# Altium PCB NCKH_PCBnew.PcbDoc
Units mm, origin at the board's own origin, x right, y up, seen from the top; angles counter-clockwise.
Board outline 122.81 x 140.59 mm, 2 copper layers (Top Layer, Bottom Layer); 78 components, 73 nets, 197 pads, 1 vias.
Unrouted connection lines stored in the file: 2.
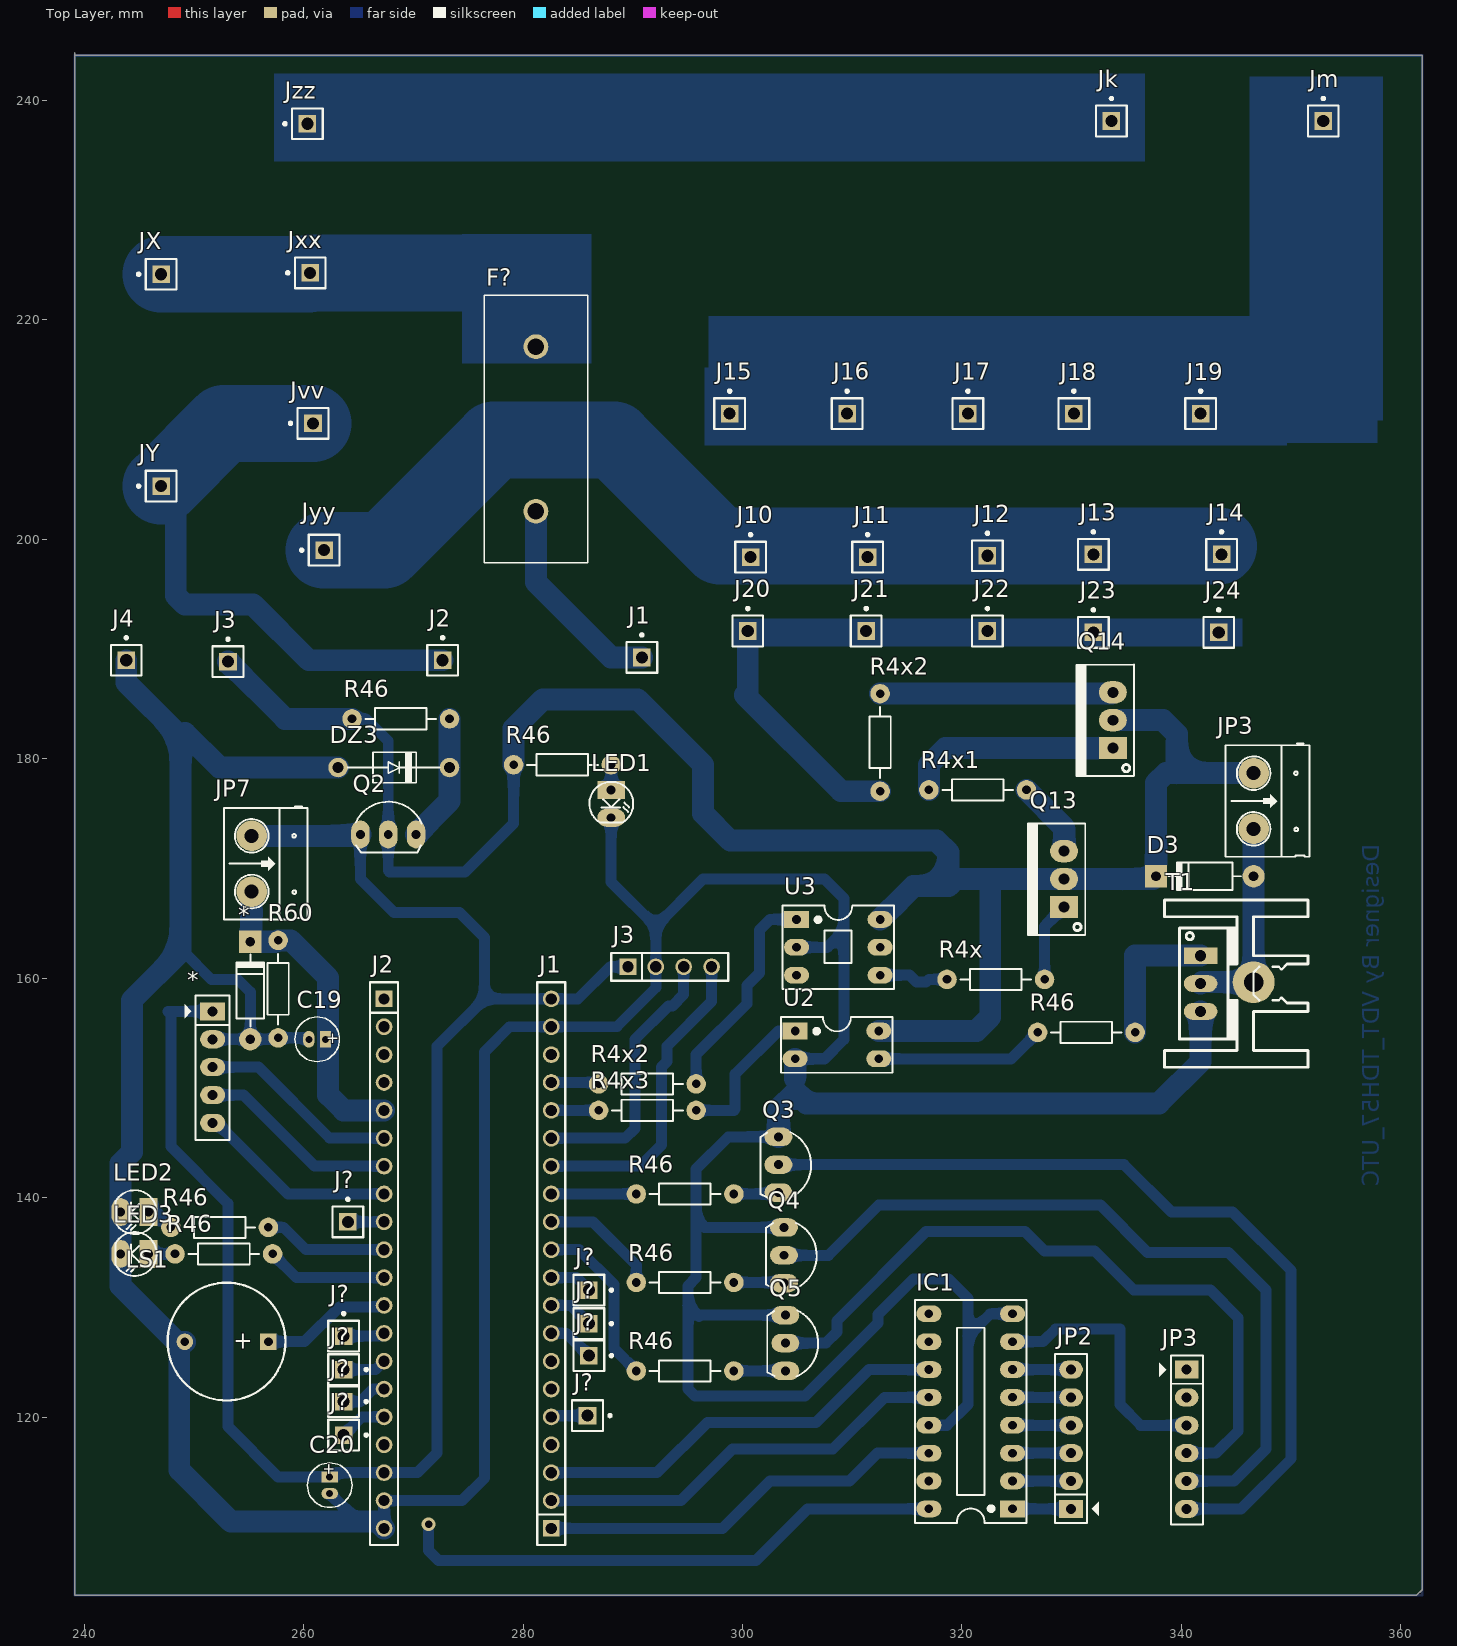
[diagram p0: Top Layer view]
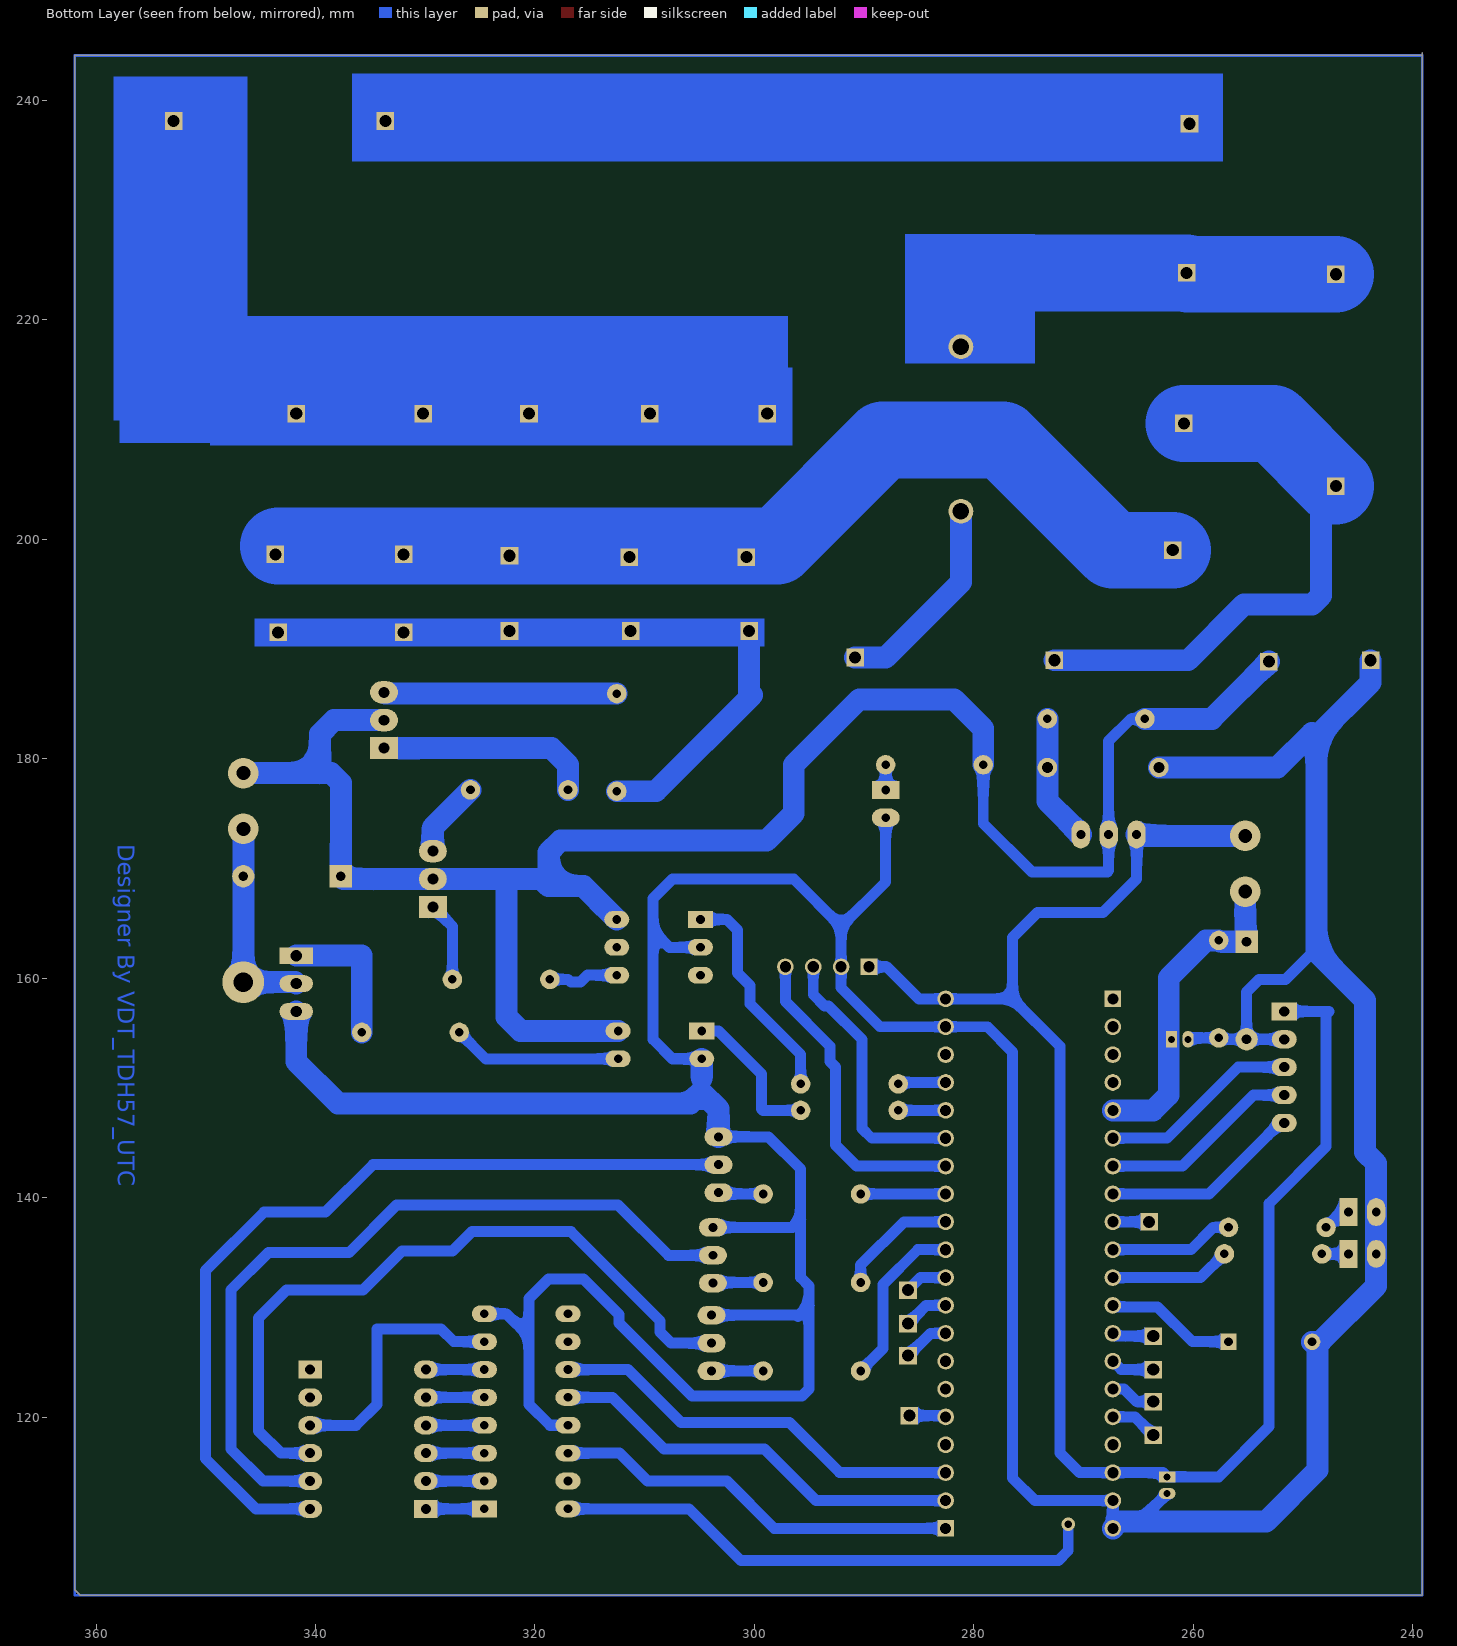
[diagram p1: Bottom Layer view, seen from below]
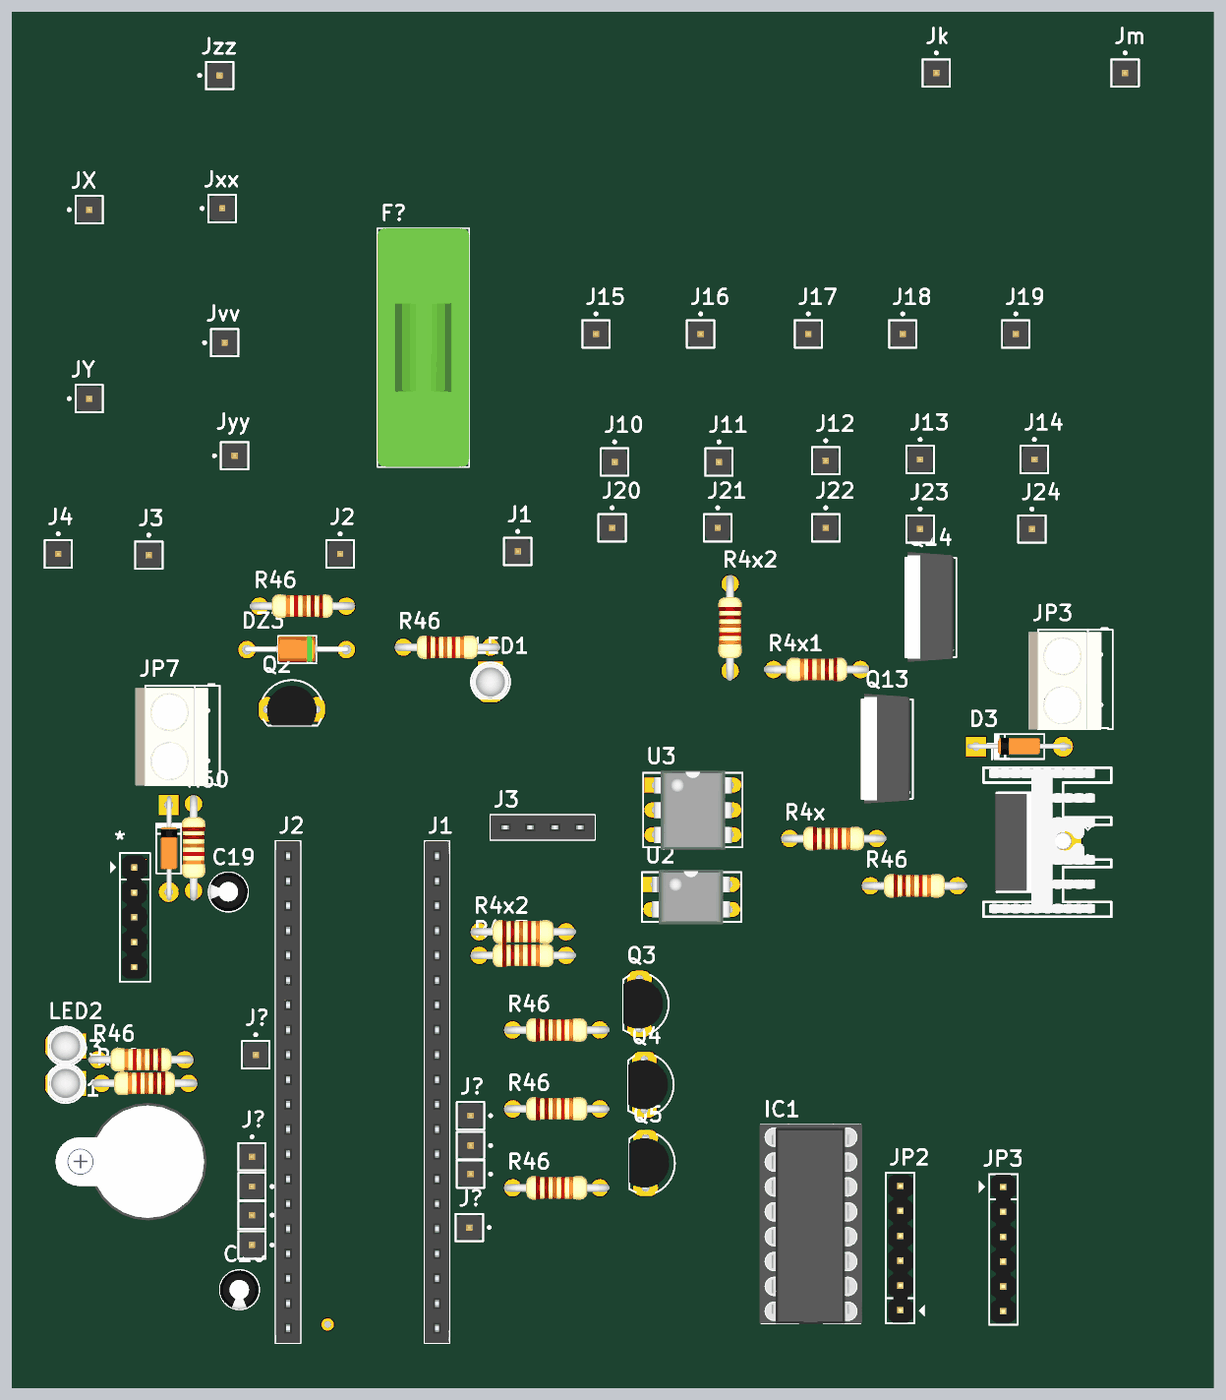
[diagram p2: 3D render of the assembled board from above, using the file's embedded part models]

## Layer stack, top to bottom
Top Solder: solder mask 0.0102, Solder Resist, Dk 3.5
Top Layer: signal copper 0.0356
Dielectric 1: dielectric 0.32, FR-4, Dk 4.8
Bottom Layer: signal copper 0.0356
Bottom Solder: solder mask 0.0102, Solder Resist, Dk 3.5

## Board outline
239.141,244.094 361.95,244.094 361.95,104.267 361.442,103.759 239.141,103.759 239.141,244.348

## Design rules (kind name [scope] priority, off if disabled: settings)
Clearance [All] p1: gap=0.254
PolygonConnect [All] p1: connectstyle=Relief reliefconductorwidth=0.254 reliefentries=4 polygonreliefangle="90 Angle" airgapwidth=0.254
RoomDefinition NCKH_sch [InComponentClass('NCKH_sch')] p1: confinementstyle=ConfineIn formatcopy=TRUE lockcomponents=FALSE outline 178.943,26.924 557.403,26.924 557.403,81.28 178.943,81.28
RoutingVias [All] p1: holewidth=0.711 width=1.27 viastyle="Through Hole" minholewidth=1.5 minwidth=1.27 maxholewidth=2.5 maxwidth=1.27
SolderMaskExpansion [All] p1: expansion=0.102
Width [All] p1: maxlimit=7 minlimit=1 preferedwidth=2
30 further rules are at their usual default settings.

## Classes and differential pairs
component class NCKH_sch: * C19 C20 D3 DZ3 F? IC1 J1 J2 J3 J4 J10 J11 J12 J13 J14 J15 J16 J17 J18 J19 J20 J21 J22 J23 J24 J? Jk Jm JP2 JP3 JP7 Jvv JX Jxx JY Jyy Jzz LED1 LED2 LED3 LS1 Q2 Q3 Q4 Q5 Q13 Q14 R4x R4x1 R4x2 R4x3 R46 R60 T1 U2 U3

## Components (designator, comment, footprint, x,y, rotation, side; value= is the part's Value field where it differs from the comment)
* "Zener" D1A 255.143,154.432 r270 top
* "JP5" JP5 251.714,156.972 r270 top
C19 "Cap Pol3" CA-040,015 262.001,154.432 r180 top
C20 "Cap Pol3" CA-040,015 262.382,114.554 r270 top
D3 "1N4007" D1A 346.583,169.291 r0 top
DZ3 "DIODE Zener" DIO-1A 263.144,179.197 r0 top
F? "Fuse" Fuse4 281.178,210.058 r270 top
IC1 "74HC595" DIP16/W0.3 324.612,111.633 r90 top
J1 "JP20" JP20-C1T 282.575,109.855 r90 top
J1 "JP1" JP1-D1T 290.83,189.23 r0 top
J2 "JP20" JP20-C1T 267.335,158.115 r270 top
J2 "JP1" JP1-D1T 272.669,188.976 r0 top
J3 "JP4" JP4-C1T 289.56,161.036 r0 top
J3 "JP1" JP1-D1T 253.111,188.849 r0 top
J4 "JP1" JP1-D1T 243.84,188.976 r0 top
J10 "JP1" JP1-D1T 300.736,198.374 r0 top
J11 "JP1" JP1-D1T 311.404,198.374 r0 top
J12 "JP1" JP1-D1T 322.326,198.501 r0 top
J13 "JP1" JP1-D1T 331.978,198.628 r0 top
J14 "JP1" JP1-D1T 343.662,198.628 r0 top
J15 "JP1" JP1-D1T 298.831,211.455 r0 top
J16 "JP1" JP1-D1T 309.531,211.455 r0 top
J17 "JP1" JP1-D1T 320.548,211.455 r0 top
J18 "JP1" JP1-D1T 330.2,211.455 r0 top
J19 "JP1" JP1-D1T 341.757,211.455 r0 top
J20 "JP1" JP1-D1T 300.482,191.643 r0 top
J21 "JP1" JP1-D1T 311.277,191.643 r0 top
J22 "JP1" JP1-D1T 322.326,191.643 r0 top
J23 "JP1" JP1-D1T 331.978,191.516 r0 top
J24 "JP1" JP1-D1T 343.408,191.516 r0 top
J? "JP1" JP1-D1T 264.033,137.795 r0 top
J? "JP1" JP1-D1T 263.652,121.412 r270 top
J? "JP1" JP1-D1T 263.652,124.333 r270 top
J? "JP1" JP1-D1T 263.652,118.364 r270 top
J? "JP1" JP1-D1T 263.652,127.381 r0 top
J? "JP1" JP1-D1T 285.877,120.142 r270 top
J? "JP1" JP1-D1T 286.004,125.603 r270 top
J? "JP1" JP1-D1T 286.004,128.524 r270 top
J? "JP1" JP1-D1T 286.004,131.572 r270 top
Jk "JP1" JP1-D1T 333.629,238.125 r0 top
Jm "JP1" JP1-D1T 352.933,238.125 r0 top
JP2 "JP6 PIN" JP6 329.946,111.633 r90 top
JP3 "JP6 PIN" JP6 340.487,124.333 r270 top
JP3 "Header 2_1" HED2 346.583,178.689 r270 top
JP7 "Header 2_1" HED2 255.27,172.974 r270 top
Jvv "JP1" JP1-D1T 260.858,210.566 r90 top
JX "JP1" JP1-D1T 247.015,224.155 r90 top
Jxx "JP1" JP1-D1T 260.604,224.282 r90 top
JY "JP1" JP1-D1T 247.015,204.851 r90 top
Jyy "JP1" JP1-D1T 261.874,199.009 r90 top
Jzz "JP1" JP1-D1T 260.35,237.871 r90 top
LED1 "LED" LED-3 288.036,177.165 r270 top
LED2 "LED" LED-3 245.872,138.684 r180 top
LED3 "LED" LED-3 245.872,134.874 r180 top
LS1 "Speaker" SPEAKER 256.794,126.873 r180 top
Q2 "C1815" QTO-92 267.716,173.101 r0 top
Q3 "C1815" QTO-92 303.276,143.002 r270 top
Q4 "C1815" QTO-92 303.784,134.747 r270 top
Q5 "C1815" QTO-92 303.911,126.746 r270 top
Q13 "H1061" QTO-220 329.311,166.497 r90 top
Q14 "H1061" QTO-220 333.756,180.975 r90 top
R4x "Res1" R1/4W 327.533,159.893 r180 top
R4x1 "Res1" R1/4W 316.992,177.165 r0 top
R4x2 "Res1" R1/4W 312.547,177.038 r90 top
R4x2 "Res1" R1/4W 295.783,150.368 r180 top
R4x3 "Res1" R1/4W 295.783,147.955 r180 top
R46 "Res1" R1/4W 299.212,124.206 r180 top
R46 "Res1" R1/4W 299.212,132.27 r180 top
R46 "Res1" R1/4W 299.212,140.335 r180 top
R46 "Res1" R1/4W 335.788,155.067 r180 top
R46 "Res1" R1/4W 264.414,183.642 r0 top
R46 "Res1" R1/4W 288.036,179.451 r180 top
R46 "Res1" R1/4W 247.904,137.287 r0 top
R46 "Res1" R1/4W 248.285,134.874 r0 top
R60 "Res1" R1/4W 257.683,154.559 r90 top
T1 "IRF840" TO220H1 341.757,159.512 r270 top
U2 "PC817" DIP4/W0.3 304.8,155.194 r270 top
U3 "MOC3021" DIP6/W0.3 304.927,165.354 r270 top

## Footprints (in the part's own frame and the unit in brackets; to place one, negate y for a bottom-side part, rotate by r counter-clockwise, add the part's x,y. Pads: shape width x height; smd on the part's side, far side on the other; paste and mask are expansions set on the pad)
CA-040,015 [mil]
  rect 40x60 hole 25: 1(0,0)
  oval 40x60 hole 25: 2(60,0)
  silkscreen extent -50,-80 110,80, body extent -49,-80 108,78, height 276
D1A [mil] "Diode 1A, W 100mil, L 350mil"
  round 80 hole 35: 1(0,0)
  rect 80x80 hole 35: 2(-350,0)
  silkscreen extent -305,-50 -45,50, body extent -386,-33 34,36, height 84
DIO-1A [mil]
  round 70 hole 40: 1(0,0) 2(400,0)
  silkscreen extent 35,-55 365,55, body extent -11,-50 411,54, height 102
DIP4/W0.3 [mil] "4 PIN, W 300mil, Pin to pin 100mil"
  rect 60x90 hole 31: 1(0,0)
  oval 60x90 hole 31: 2(100,0) 3(100,300) 4(0,300)
  silkscreen extent -50,-50 150,350, body extent -59,-10 159,305, height 170
DIP6/W0.3 [mil] "6 PIN, W 300mil, Pin to pin 100mil"
  rect 60x90 hole 31.5: 1(0,0)
  oval 60x90 hole 31.5: 2(100,0) 3(200,0) 4(200,300) 5(100,300) 6(0,300)
  silkscreen extent -50,-50 250,350, body extent -58,-7 260,307, height 170
DIP16/W0.3 [mil] "16 PIN, W 300mil, Pin to pin 100mil"
  rect 60x90 hole 31: 1(0,0)
  oval 60x90 hole 31: 2(100,0) 3(200,0) 4(300,0) 5(400,0) 6(500,0) 7(600,0) 8(700,0) 9(700,300) 10(600,300) 11(500,300) 12(400,300) 13(300,300) 14(200,300) 15(100,300) 16(0,300)
  silkscreen extent -50,-50 750,350, body extent -52,-57 752,356, height 299
Fuse4 [mm] "FUSEHOLDER BLOCKS - PCB - CLIP COVER - THT - WR-FSH"
  round 2.25 hole 1.5: 1(-7.5,0) 2(7.5,0)
  silkscreen extent -12.2,-4.7 12.2,4.7, body extent -12.2,-4.7 12.2,4.7, height 23.72
HED2 [mil] "Header 2, 2 pin, hight 300mil, Pin to Pin 200, Colour Green"
  round 110 hole 50: 1(0,0) 2(200,0)
  silkscreen extent -106,-100 300,200, body extent -92,-140 302,155, height 394
JP1-D1T [mm] "1pins, 1 row, straight, gold plating"
  rect 1.6x1.6 hole 1.1: 1(0,0)
  silkscreen extent -1.4,-1.4 1.4,2.17, body extent -1.27,-1.27 1.27,1.27, height 8.54
JP4-C1T [mm] "4 row, straight, gold plating"
  rect 1.52x1.52 hole 1.02: 1(0,0)
  round 1.52 hole 1.02: 2(2.54,0) 3(5.08,0) 4(7.62,0)
  silkscreen extent -1.52,-1.27 9.14,1.27, body extent -1.52,-1.25 9.14,1.25, height 8.51
JP5 [mil] "JP5"
  rect 65x90 hole 36: 1(0,0)
  oval 65x90 hole 36: 2(100,0) 3(200,0) 4(300,0) 5(400,0)
  silkscreen extent -57,-101 461,60, body extent -48,-53 448,45, height 323
JP6 [mil] "JP6"
  rect 65x85 hole 36: 1(0,0)
  oval 65x85 hole 36: 2(100,0) 3(200,0) 4(300,0) 5(400,0) 6(500,0)
  silkscreen extent -50,-99 556,58, body extent -48,-50 548,48, height 323
JP20-C1T [mm] "20 row, straight, gold plating"
  rect 1.52x1.52 hole 1.02: 1(0,0)
  round 1.52 hole 1.02: 2(2.54,0) 3(5.08,0) 4(7.62,0) 5(10.16,0) 6(12.7,0) 7(15.24,0) 8(17.78,0) 9(20.32,0) 10(22.86,0) 11(25.4,0) 12(27.94,0) 13(30.48,0) 14(33.02,0) 15(35.56,0) 16(38.1,0) 17(40.64,0) 18(43.18,0) 19(45.72,0) 20(48.26,0)
  silkscreen extent -1.52,-1.27 49.78,1.27, body extent -1.52,-1.25 49.78,1.25, height 8.51
LED-3 [mil] "LED 2 PIN, 3ly Only colour"
  rect 65x100 hole 32: 1(0,0)
  oval 65x100 hole 32: 2(100,0)
  silkscreen extent -29,-78 118,79, body extent -25,-75 113,75, height 217
QTO-92 [mil] "TO-92"
  oval 66x100 hole 32: 1(-100,0) 2(0,0) 3(100,0)
  silkscreen extent -117,-65 120,118, body extent -109,-66 109,95, height 245
QTO-220 [mil] "TO-220 - 1-2-3"
  rect 80x100 hole 39: 1(0,0)
  oval 80x100 hole 39: 2(100,0) 3(200,0)
  silkscreen extent -100,-76 300,130, body extent -119,-64 322,121, height 755
R1/4W [mil] "R 1/4W, 2 Pin, 350mil"
  round 70 hole 31: 1(0,0) 2(350,0)
  silkscreen extent 48,-38 302,38, body extent -40,-47 386,47, height 111
SPEAKER [mm]
  rect 1.5x1.5 hole 0.8: 1(0,0)
  round 1.5 hole 0.8: 2(7.62,0.013)
  silkscreen extent -1.55,-5.38 9.18,5.36, body extent -2.22,-6 13.24,6, height 4.5
TO220H1 [mil] "TO-220 - 1-2-3"
  rect 60x120 hole 40: 1(-100,0)
  round 150 hole 70: 2(-5,190)
  oval 60x120 hole 40: 2(0,0) 3(100,0)
  silkscreen extent -300,-130 300,385, body extent -296,-107 286,319, height 1024

## Part data
C19: library part "Cap Pol3_1", "Polarized Capacitor (Surface Mount)"
C20: library part "Cap Pol3_2", "Polarized Capacitor (Surface Mount)"
D3: library part D1A, "Diode 1A"
DZ3: "DIODE GEN PURP 75V 200MA LLDS"
F?: "FUSE GLASS 200MA 250VAC 5X20MM"
IC1: library part 74595, "8 Bit Serial input - Parallel Output"
J1 J1 J2 J2 J3 J3 J4 J10 J11 J12 J13 J14 J15 J16 J17 J18 J19 J20 J21 J22 J23 J24 J? J? J? J? J? J? J? J? J? Jk Jm Jvv JX Jxx JY Jyy Jzz: "WR-PHD 2.54 mm Angled Socket Header"
JP2 JP3: library part JP6
JP3 JP7: "Header, 2-Pin"
LED1 LED2 LED3: "LED Single colour Green and Red"
LS1: "Speakers & Transducers SPEAKER 17mm"
Q2 Q3 Q4 Q5: "NPN 600mW, ECB"
Q13 Q14: library part NPN_BCE, "P 1W, BCE"
R4x R4x1 R4x2 R4x2 R4x3 R46 R46 R46 R46 R46 R46 R46 R46 R60: library part Res1_1, "Resistor"
T1: "MOSFET N-CH 500V 8A TO-220"
U2 U3: "Single Opto"

## Via types
v1: diameter 1.27, hole 0.711, Top Layer to Bottom Layer, 1 vias

## Nets (pads, with @x,y where several pads share a name; then routed paths per layer and width w, separated by ;. In a path a pad name is that pad's centre, name@x,y a point inside that pad or via, vN(x,y) a via of type N, cw(c..) or ccw(c..) an arc to the next point about the centre after c; other vN are vias at no path point)
5V: J1.18
12V: D3.2 J3.1@253.111,188.849 JP3.1@346.583,178.689 Q2.2 Q13.2 Q14.2 R46.1@264.414,183.642 R46.2@279.146,179.451 U2.4 U3.6 | length 181.3
  Bottom Layer w1: R46.1@264.414,183.642 265.684,183.642 267.716,181.61 Q2.2 267.716,169.799 267.843,169.672 274.701,169.672 279.146,174.117 R46.2@279.146,179.451 ; 322.58,168.402 322.58,169.037
  Bottom Layer w2: J3.1@253.111,188.849 258.318,183.642 R46.1@264.414,183.642 ; R46.2@279.146,179.451 279.146,182.753 281.813,185.42 290.449,185.42 296.418,179.451 296.418,175.006 298.894,172.529 317.69,172.529 318.77,171.45 318.77,168.402 ; U2.4 321.31,155.194 322.58,156.464 322.58,168.402 ; U3.6 315.595,168.402 318.77,168.402 ; Q14.2 338.328,183.515 339.598,182.245 339.598,178.689 ; JP3.1@346.583,178.689 339.598,178.689 ; 318.77,168.402 319.405,169.037 322.58,169.037 Q13.2 337.439,169.037 D3.2 337.693,177.8 338.582,178.689 339.598,178.689
198V: Jk.1 Jzz.1
A: IC1.1 JP2.1 | length 5.3
  Bottom Layer w1: IC1.1 JP2.1
B: IC1.2 JP2.2 | length 5.3
  Bottom Layer w1: IC1.2 JP2.2
C: IC1.3 JP2.3 | length 5.3
  Bottom Layer w1: IC1.3 JP2.3
D: IC1.4 JP2.4 | length 5.3
  Bottom Layer w1: IC1.4 JP2.4
D_1: JP3.6 Q3.2 | length 79.3
  Bottom Layer w1: Q3.2 334.772,143.002 339.09,138.684 344.678,138.684 350.012,133.35 350.012,116.205 345.44,111.633 JP3.6
D_2: JP3.5 Q4.2 | length 72
  Bottom Layer w1: Q4.2 307.848,134.747 312.42,139.319 332.613,139.319 336.931,135.001 344.297,135.001 347.726,131.572 347.726,117.094 344.805,114.173 JP3.5
D_3: JP3.4 Q5.2 | length 65.2
  Bottom Layer w1: Q5.2 307.594,126.746 308.61,127.762 308.61,128.778 316.738,136.906 325.755,136.906 327.533,135.128 332.105,135.128 335.661,131.572 342.646,131.572 345.186,129.032 345.186,118.745 343.154,116.713 JP3.4
E: IC1.5 JP2.5 | length 5.3
  Bottom Layer w1: IC1.5 JP2.5
F: IC1.6 JP2.6 | length 5.3
  Bottom Layer w1: IC1.6 JP2.6
G: IC1.7 JP3.3 | length 24
  Bottom Layer w1: IC1.7 327.406,126.873 328.549,128.016 334.391,128.016 334.391,121.158 336.296,119.253 JP3.3
GND: *.1@255.143,154.432 *.2@251.714,154.432 C19.2 C20.2 DZ3.1 IC1.8 IC1.13 J1.19 J2.19 J2.20 J3.2 J4.1 LED1.2 LED2.2 LED3.2 LS1.2 Q3.1 Q4.1 Q5.1 R60.1 T1.3 U2.2 U3.2 | length 421.8
  Bottom Layer w1: 248.793,162.433 249.047,162.433 251.587,159.893 254,159.893 255.143,158.75 *.1@255.143,154.432 ; *.2@251.714,154.432 *.1@255.143,154.432 ; C19.2 260.35,154.559 R60.1 257.556,154.432 *.1@255.143,154.432 ; C20.2 264.922,110.49 ; J2.20 J2.19 274.447,112.395 276.479,114.427 276.479,153.289 278.765,155.575 J1.19 288.544,155.575 292.1,159.131 J3.2 292.1,164.719 ; LED1.2 288.036,168.783 292.1,164.719 ; Q3.1 298.704,145.542 295.783,142.621 295.783,138.049 ; Q4.1 296.545,137.287 295.783,138.049 ; Q5.1 296.164,129.286 296.037,129.159 295.021,130.175 ; 304.8,150.876 304.8,150.368 306.578,148.59 ; U2.2 307.467,152.654 309.245,154.432 309.245,164.338 ; U3.2 307.721,162.814 309.245,164.338 ; IC1.13 318.643,119.253 320.548,121.158 320.548,127.381 ; IC1.8 322.58,129.413 320.548,127.381 ; 292.1,164.719 296.418,169.037 307.467,169.037 309.245,167.259 309.245,164.338 ; 295.021,130.175 295.021,131.953 295.783,132.715 295.783,138.049 ; 295.021,130.175 295.021,122.555 295.656,121.92 305.689,121.92 312.356,128.588 312.356,129.35 315.595,132.588 318.77,132.588 320.548,130.81 320.548,127.381
  Bottom Layer w2: J4.1 243.84,186.944 248.793,181.991 ; LS1.2 LS1.2@248.666,126.86 ; DZ3.1 252.349,179.197 249.174,182.372 248.793,181.991 ; J2.20 266.7,110.49 264.922,110.49 253.365,110.49 248.666,115.189 LS1.2@248.666,126.86 ; Q3.1 303.276,148.082 304.8,149.606 304.8,148.971 ; 304.8,150.876 U2.2 ; 305.118,149.288 305.816,148.59 306.578,148.59 337.947,148.59 341.757,152.4 T1.3 ; LS1.2@248.666,126.86 248.425,126.86 243.332,131.953 LED3.2 LED2.2 243.332,143.129 244.348,144.145 244.348,157.988 248.793,162.433 248.793,181.991
GND_198V: J10.1 J11.1 J12.1 J13.1 J14.1 Jyy.1 | length 89.7
  Bottom Layer w7: Jyy.1 267.335,199.009 277.368,209.042 288.29,209.042 297.942,199.39 J14.1@343.408,199.39
NetD3_1: D3.1 JP3.2@346.583,173.609 T1.2 | length 18.8
  Bottom Layer w2: T1.2@341.757,159.512 341.884,159.639 346.583,159.639 D3.1 JP3.2@346.583,173.609
NetDZ3_2: DZ3.2 Q2.3 R46.2@273.304,183.642 | length 11.8
  Bottom Layer w2: Q2.3 273.304,176.149 DZ3.2 R46.2@273.304,183.642
NetF?_1: F?.1 JX.1 Jxx.1 | length 27.5
  Bottom Layer w7: JX.1 260.477,224.155 Jxx.1 274.454,224.282
NetF?_2: F?.2 J1.1@290.83,189.23 | length 19
  Bottom Layer w2: F?.2 281.178,196.088 288.036,189.23 J1.1@290.83,189.23
NetJ2_1: J2.1@272.669,188.976 Jvv.1 JY.1 | length 53.5
  Bottom Layer w2: JY.1 248.348,203.518 248.348,194.882 249.174,194.056 255.397,194.056 260.477,188.976 J2.1@272.669,188.976
  Bottom Layer w7: JY.1 252.73,210.566 Jvv.1
NetLED1_1: LED1.1 R46.1@288.036,179.451 | length 2.3
  Bottom Layer w1: LED1.1 R46.1@288.036,179.451
NetLED2_1: LED2.1 R46.1@247.904,137.287 | length 2.6
  Bottom Layer w1: LED2.1 246.507,138.684 R46.1@247.904,137.287
NetLED3_1: LED3.1 R46.1@248.285,134.874 | length 2.4
  Bottom Layer w1: LED3.1 R46.1@248.285,134.874
NetQ3_3: Q3.3 R46.1@299.212,140.335 | length 4.1
  Bottom Layer w1: R46.1@299.212,140.335 303.149,140.335 Q3.3
NetQ4_3: Q4.3 R46.1@299.212,132.27 | length 4.6
  Bottom Layer w1: R46.1@299.212,132.27 303.721,132.27 Q4.3
NetQ5_3: Q5.3 R46.1@299.212,124.206 | length 4.7
  Bottom Layer w1: R46.1@299.212,124.206 Q5.3
NetQ13_1: Q13.1 R4x.1 | length 7.3
  Bottom Layer w1: R4x.1 327.533,164.719 Q13.1
NetQ13_3: Q13.3 R4x1.2 | length 7
  Bottom Layer w2: R4x1.2 329.311,173.736 Q13.3
NetQ14_1: Q14.1 R4x1.1 | length 19.7
  Bottom Layer w2: R4x1.1 316.992,179.451 318.516,180.975 Q14.1
NetQ14_3: Q14.3 R4x2.2@312.547,185.928 | length 21.3
  Bottom Layer w2: R4x2.2@312.547,185.928 333.629,185.928 Q14.3
NetR4x2_1: R4x2.1@295.783,150.368 U3.1 | length 20.2
  Bottom Layer w1: R4x2.1@295.783,150.368 295.783,153.035 300.418,157.671 300.418,159.321 301.561,160.464 301.561,164.401 302.514,165.354 U3.1
NetR4x3_1: R4x3.1 U2.1 | length 13.9
  Bottom Layer w1: R4x3.1 299.212,147.955 299.339,148.082 299.339,151.257 303.276,155.194 U2.1
NetR4x_2: R4x.2 U3.4 | length 6.6
  Bottom Layer w1: U3.4 315.214,160.274 315.849,159.639 316.738,159.639 316.992,159.893 R4x.2 R4x.2@318.77,160.02
NetR46_1: R46.1@335.788,155.067 T1.1 | length 13
  Bottom Layer w2: R46.1@335.788,155.067 335.788,162.052 T1.1
NetR46_2: R46.2@326.898,155.067 U2.3 | length 15.5
  Bottom Layer w1: U2.3 324.485,152.654 R46.2@326.898,155.067
NRST: J2.17
OUT: J15.1 J16.1 J17.1 J18.1 J19.1 Jm.1 | length 0.7
  Bottom Layer w7: Jm.1 Jm.1@353.441,237.617
PA0: *.2@255.143,163.322 C19.1 J2.5 JP7.2 R60.2 | length 29.5
  Bottom Layer w2: JP7.2 255.27,163.449 255.143,163.322 257.556,163.322 R60.2 258.826,163.449 262.239,160.036 262.239,149.368 263.652,147.955 J2.5
PA1: *.3 J2.6 | length 18.3
  Bottom Layer w1: *.3 255.905,151.892 262.382,145.415 J2.6
PA2: *.4 J2.7 | length 18.3
  Bottom Layer w1: *.4 254.508,149.352 260.985,142.875 J2.7
PA3: *.5 J2.8 | length 18.3
  Bottom Layer w1: *.5 252.095,146.812 258.572,140.335 J2.8
PA4: J2.9 J?.1@264.033,137.795 | length 3.3
  Bottom Layer w1: J?.1@264.033,137.795 J2.9
PA5: J2.10 R46.2@256.794,137.287 | length 11.4
  Bottom Layer w1: R46.2@256.794,137.287 258.191,137.287 260.223,135.255 J2.10
PA6: J2.11 R46.2@257.175,134.874 | length 11.1
  Bottom Layer w1: R46.2@257.175,134.874 259.334,132.715 J2.11
PA7: J2.12 LS1.1 | length 11.9
  Bottom Layer w1: LS1.1 260.096,126.873 263.271,130.048 267.208,130.048 J2.12
PA8: J1.5 J?.1@285.877,120.142 | length 3.4
  Bottom Layer w1: J1.5 282.702,120.142 J?.1@285.877,120.142
PA9: J1.6
PA10: J1.7
PA11: J1.8 J?.1@286.004,125.603 | length 4.3
  Bottom Layer w1: J1.8 283.972,127.635 J?.1@286.004,125.603
PA12: J1.9 J?.1@286.004,128.524 | length 4.1
  Bottom Layer w1: J1.9 284.353,130.175 J?.1@286.004,128.524
PA15: J1.10 J?.1@286.004,131.572 | length 3.9
  Bottom Layer w1: J1.10 284.861,132.715 J?.1@286.004,131.572
PB0: J2.13 J?.1@263.652,127.381 | length 3.8
  Bottom Layer w1: J?.1@263.652,127.381 267.081,127.381 J2.13
PB1: J2.14 J?.1@263.652,124.333 | length 4
  Bottom Layer w1: J?.1@263.652,124.333 266.573,124.333 J2.14
PB3: J1.11 R46.2@290.322,124.206 | length 15.7
  Bottom Layer w1: J1.11 285.115,135.255 288.29,132.08 288.29,126.238 R46.2@290.322,124.206
PB4: J1.12 R46.2@290.322,132.27 | length 11
  Bottom Layer w1: J1.12 286.385,137.795 290.322,133.858 R46.2@290.322,132.27
PB5: J1.13 R46.2@290.322,140.335 | length 7.7
  Bottom Layer w1: J1.13 R46.2@290.322,140.335
PB6: J1.14 J3.4 | length 29
  Bottom Layer w1: J1.14 290.703,142.875 292.608,144.78 292.608,151.892 293.116,152.4 293.116,153.797 297.18,157.861 J3.4
PB7: J1.15 J3.3 | length 24.8
  Bottom Layer w1: J1.15 289.306,145.415 290.195,146.304 290.195,154.432 293.243,157.48 293.624,157.48 294.64,158.496 J3.3
PB8: J1.16 R4x3.2 | length 4.3
  Bottom Layer w1: J1.16 R4x3.2
PB9: J1.17 R4x2.2@286.893,150.368 | length 4.4
  Bottom Layer w1: J1.17 286.766,150.495 R4x2.2@286.893,150.368
PB10: J2.15 J?.1@263.652,121.412 | length 4.2
  Bottom Layer w1: J?.1@263.652,121.412 265.176,121.412 266.319,122.555 J2.15
PB11: J2.16 J?.1@263.652,118.364 | length 4.4
  Bottom Layer w1: J?.1@263.652,118.364 265.303,120.015 J2.16
PB12: IC1.14 J1.1@282.575,109.855 | length 37.3
  Bottom Layer w1: J1.1@282.575,109.855 298.196,109.855 302.514,114.173 309.753,114.173 312.293,116.713 IC1.14
PB13: IC1.12 J1.2 | length 38.3
  Bottom Layer w1: J1.2 294.386,112.395 299.085,117.094 308.229,117.094 312.928,121.793 IC1.12
PB14: IC1.11 J1.3 | length 38.3
  Bottom Layer w1: J1.3 292.227,114.935 296.799,119.507 306.705,119.507 311.531,124.333 IC1.11
PB15: J1.4
PC13: J2.2
PC14: J2.3
PC15: J2.4
R4X1: J20.1 J21.1 J22.1 J23.1 J24.1 R4x2.1@312.547,177.038 | length 20.5
  Bottom Layer w2: 300.482,190.246 300.482,186.055 300.228,185.801 308.991,177.038 R4x2.1@312.547,177.038
SQH: IC1.9
VBAT: J2.1@267.335,158.115
VCC: *.1@251.714,156.972 C20.1 IC1.10 IC1.16 J1.20 J2.18 J3.1@289.56,161.036 JP7.1 Q2.1 | length 216.4
  Bottom Layer w1: *.1@251.714,156.972 247.65,156.972 247.904,156.718 247.904,144.653 253.111,139.446 253.111,119.126 257.683,114.554 C20.1 262.763,114.935 J2.18 270.383,114.935 272.161,116.713 272.161,153.797 276.479,158.115 ; JP7.1 255.397,173.101 Q2.1 265.176,169.037 268.224,165.989 274.193,165.989 276.479,163.703 276.479,158.115 ; v1@271.399,109.728 271.399,107.823 272.288,106.934 301.244,106.934 305.943,111.633 IC1.16 ; J3.1@289.56,161.036 287.909,161.036 284.988,158.115 J1.20 276.479,158.115
  Bottom Layer w2: JP7.1 265.049,172.974 Q2.1
  other v1: 271.399,110.236
pads on no net: IC1.15 JP3.1@340.487,124.333 JP3.2@340.487,121.793 U3.3 U3.5
copper on no net: | length 526.3
  Bottom Layer w0.254: 239.141,103.759 361.95,103.759 361.95,244.094 239.141,244.094 239.141,103.759

## Other copper
Bottom Layer:
  rectangle net OUT: 296.926,213.233 348.488,220.345
  rectangle net OUT: 346.202,210.82 358.394,242.189
  rectangle net OUT: 347.98,208.788 357.886,240.538
  rectangle net OUT: 296.545,208.534 349.631,215.646
  rectangle net 198V: 257.302,234.442 336.677,242.443
  rectangle net R4X1: 299.085,190.246 345.567,192.786
  rectangle net NetF?_1: 274.447,216.027 286.258,227.838
  text "Designer By VDT_TDH57_UTC" at 358.013,172.212 h1.52 r90

## Text inside footprints (layer, text, board x,y; h text height)
C19: Top Overlay "+" at 263.271,154.94 h1.02 r180
C20: Top Overlay "+" at 261.874,115.824 h1.02 r270
LS1: Top Overlay "+" at 255.384,127.584 h1.52 r180